# Altium PCB TAUV-Acoustics Power Board.PcbDoc
Units mil, origin at the board's own origin, x right, y up, seen from the top; angles counter-clockwise.
Board outline 2260 x 1615 mil, 2 copper layers (Top Layer, Bottom Layer); 34 components, 18 nets, 107 pads, 19 vias.
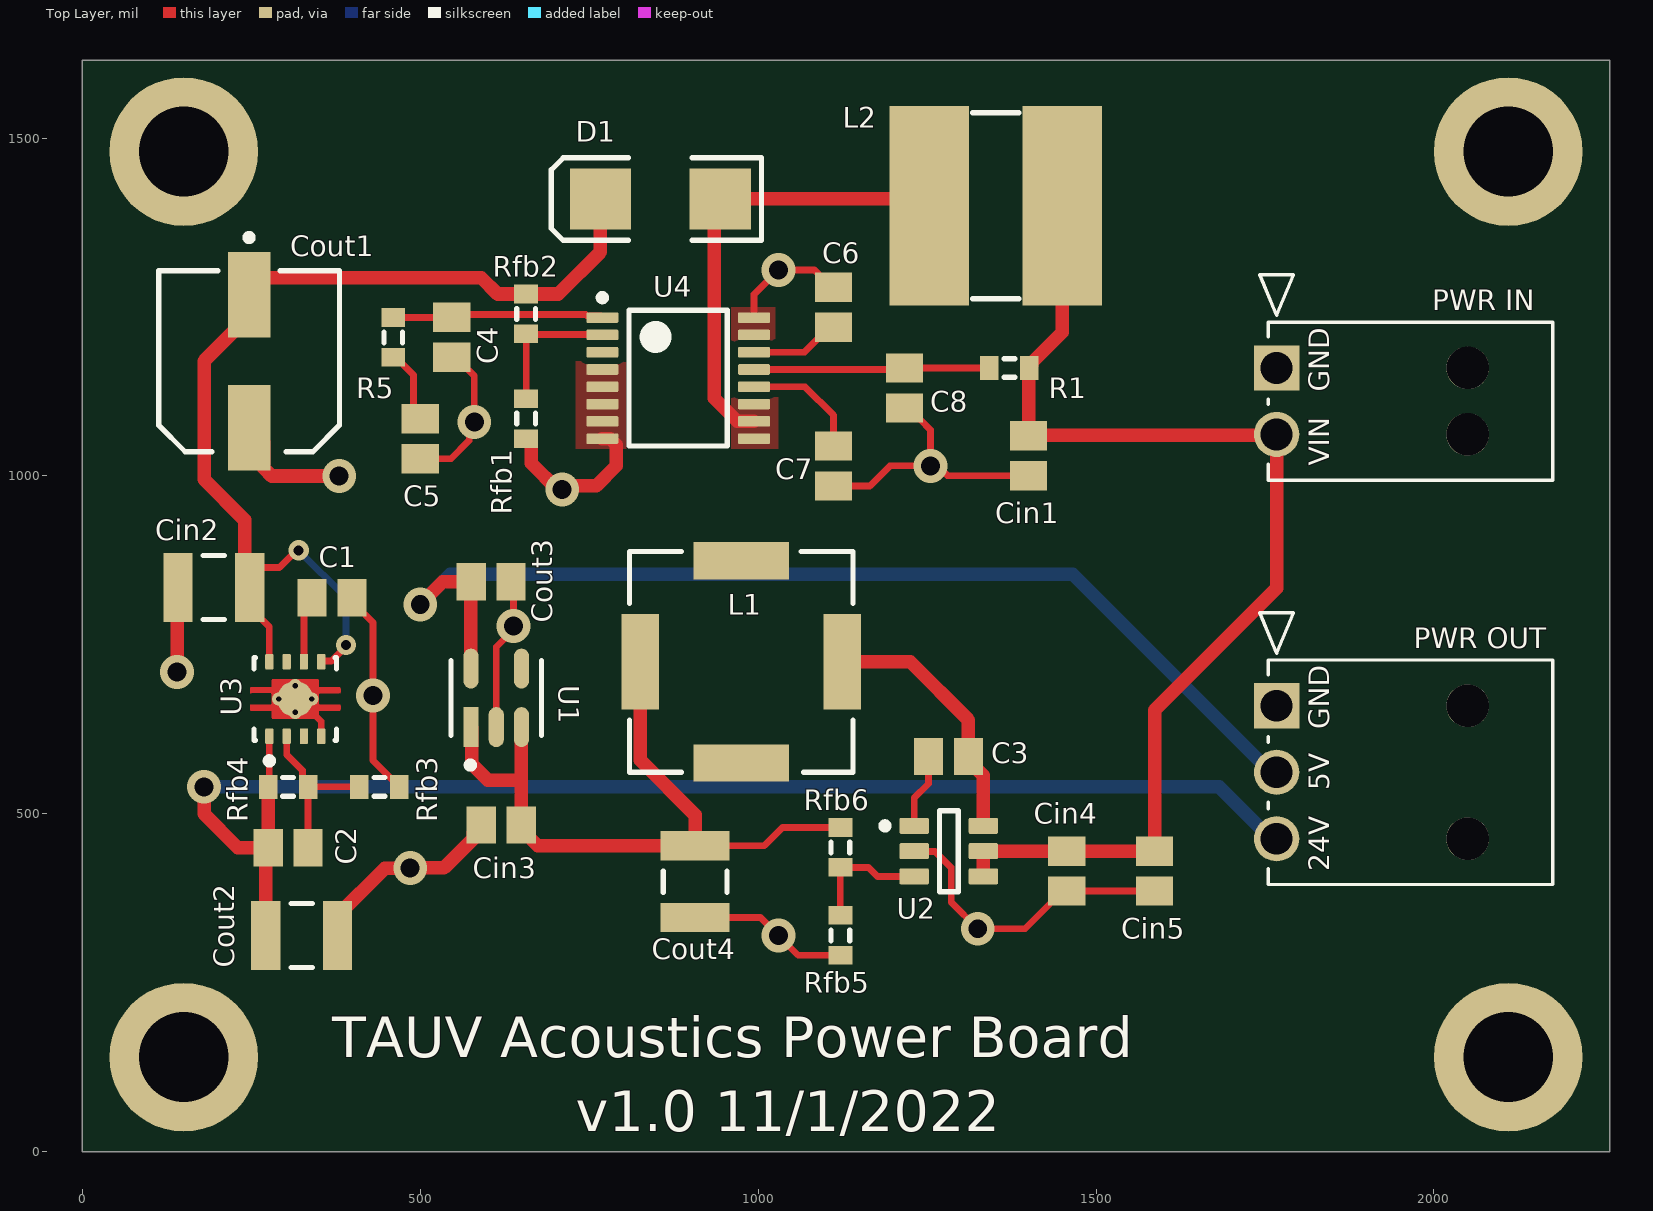
[diagram p0: Top Layer view]
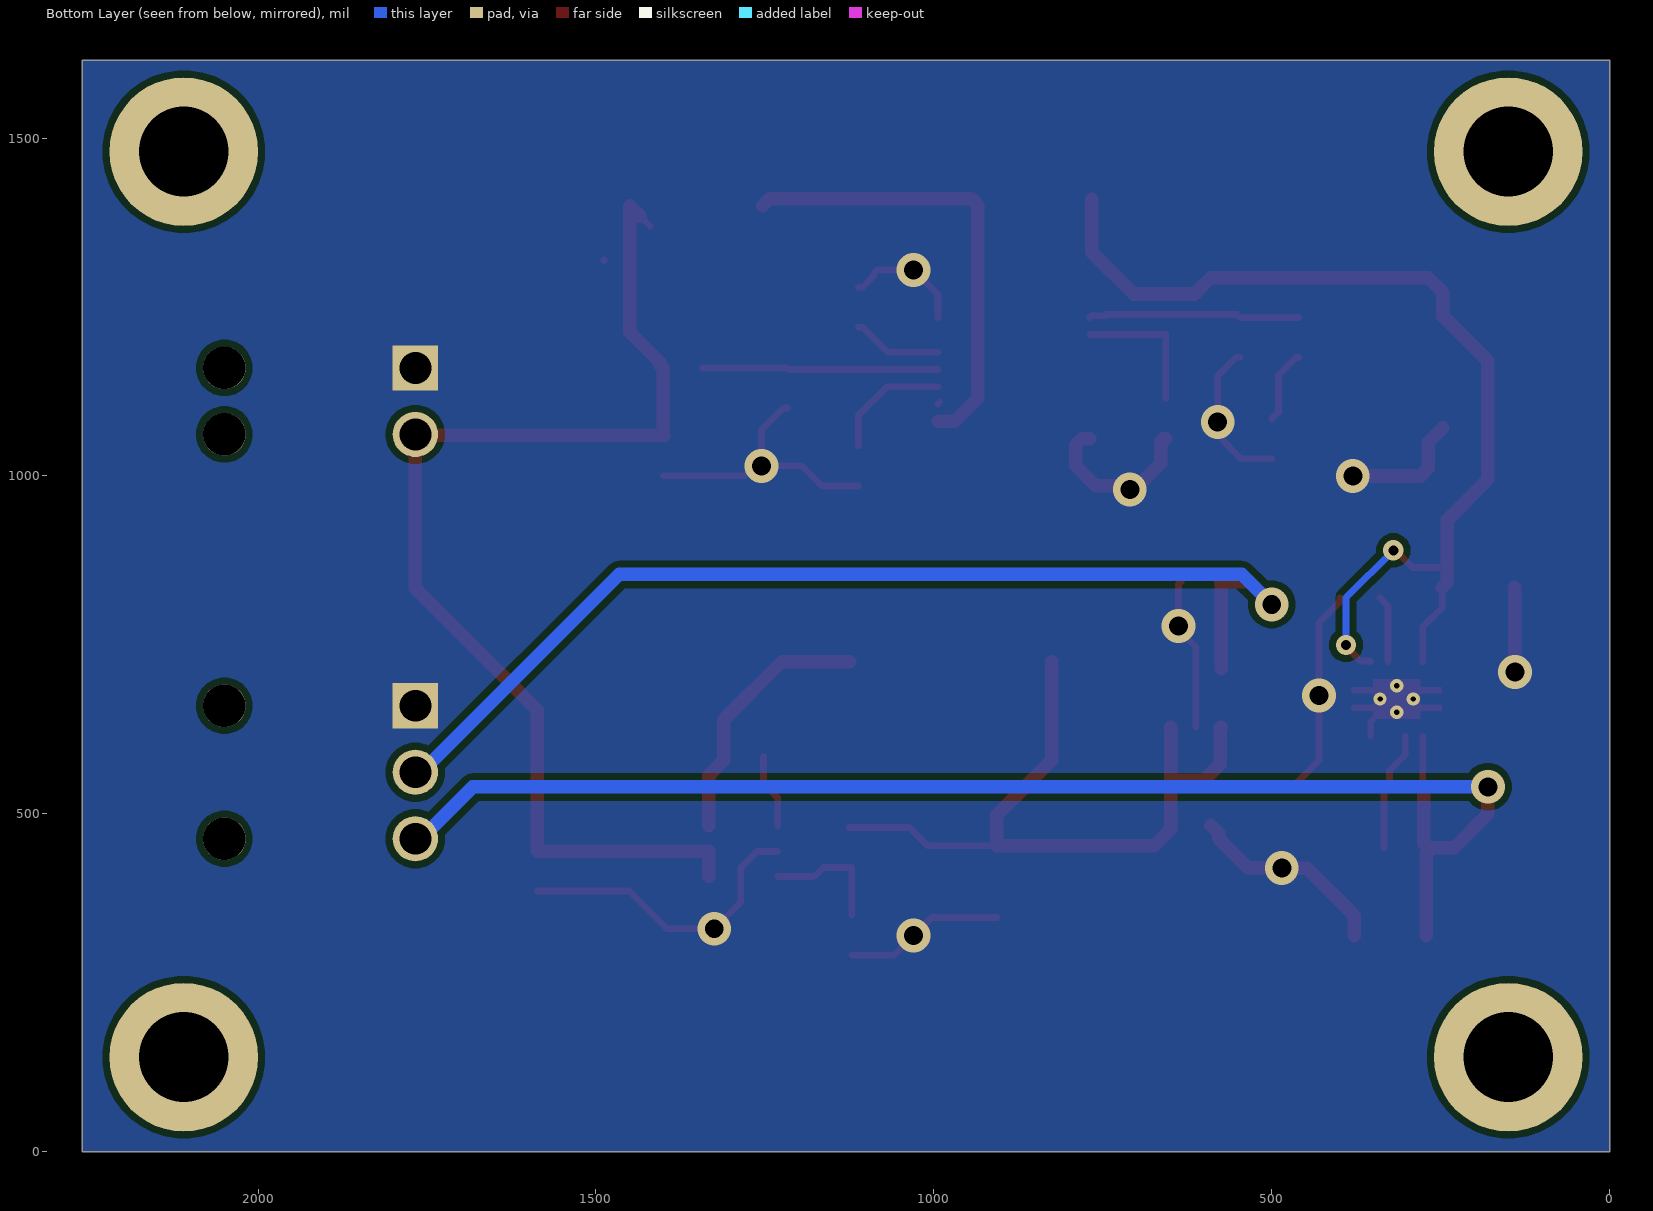
[diagram p1: Bottom Layer view, seen from below]

## Layer stack, top to bottom
Top Solder: solder mask 0.4, Solder Resist, Dk 3.5
Top Layer: signal copper 1.4
Dielectric 1: dielectric 12.6, FR-4, Dk 4.8
Bottom Layer: signal copper 1.4
Bottom Solder: solder mask 0.4, Solder Resist, Dk 3.5

## Board outline
0,0 2260,0 2260,1615 0,1615

## Design rules (kind name [scope] priority, off if disabled: settings)
Clearance [All] p1: gap=10 ignorepadtopadclearanceinfootprint=FALSE except(0: Arc-Hole Track-Hole SMDPad-Hole THPad-Hole Via-Hole Fill-Hole Poly-Hole Region-Hole Text-Hole)
HoleSize [All] p1: absolutevalues=TRUE maxlimit=200 minlimit=1 maxpercent=80.000 minpercent=20.000
PlaneConnect [All] p1: planeconnectstyle=Direct reliefexpansion=20 reliefentries=4 reliefconductorwidth=10 reliefairgap=10
PolygonConnect [All] p1: connectstyle=Direct reliefconductorwidth=10 reliefentries=4 polygonreliefangle="90 Angle" airgapwidth=10
RoomDefinition Main [InComponentClass('Main')] p1: confinementstyle=ConfineIn formatcopy=TRUE lockcomponents=FALSE outline -963.37,-0.2 1701.63,-0.2 1701.63,1584.8 -963.37,1584.8
RoutingVias [All] p1: holewidth=15 width=30 viastyle="Through Hole" minholewidth=28 minwidth=50 maxholewidth=28 maxwidth=50
SolderMaskExpansion [All] p1: expansion=4 istentingtop=FALSE
Width [All] p1: maxlimit=50 minlimit=5 preferedwidth=10
28 further rules are at their usual default settings.

## Components (designator, comment, footprint, x,y, rotation, side; value= is the part's Value field where it differs from the comment)
C1 "Low ESR" C0805 369.45,820 r180 top value="10 nF"
C2 "Reg" C0805 304.45,450 r180 top value="10 nF"
C3 "Low ESR" C0805 1281.63,584.8 r180 top value="100 nF"
C4 "Low ESR" C0805 546.63,1205.28 r90 top value=100pF
C5 "Low ESR" C0805 500,1055 r90 top value="2.2 nF"
C6 "Low ESR" C0805 1111.63,1249.8 r270 top value="10 nF"
C7 "Low ESR" C0805 1111.63,1014.8 r90 top value="100 nF"
C8 "Reg" C0805 1216.63,1130.28 r90 top value="100 nF"
Cin1 "Low ESR" C0805 1400,1030 r90 top value="2.2 μF"
Cin2 "Low ESR" C1210 194.45,835 r180 top value="10 μF"
Cin3 "Low ESR X7R" C0805 619.8,483.37 r180 top value="1 μF"
Cin4 "Reg" C0805 1456.63,415.28 r90 top value="100 nF"
Cin5 "Reg" C0805 1586.63,415.28 r90 top value="1 μF"
Cout1 "Low ESR" FP-EEH-D8-MFG 246.63,1169.8 r270 top
Cout2 "Low ESR" C1210 324.45,320 r180 top value="10 μF"
Cout3 "Low ESR X7R" C0805 604.8,843.37 r180 top value="1 μF"
Cout4 "Low ESR" C1210 906.63,399.8 r90 top value="10 μF"
D1 "550mV  1A" SMB 855.21,1409.8 r180 top
L1 "5.6 µH 120mOhm" WE-TPC-8012 975,725 r180 top
L2 "390µH 1.77Ohm" WE-PD2-L 1351.57,1400 r180 top
"PWR IN" "1053131302" CON_1053131302 1767.32,1160 r90 top
"PWR OUT" "1053131303" CON_1053131303 1767.32,660 r90 top
R1 "±5%" J1-0603 1371.63,1159.8 r0 top value="10 Ohm"
R5 "±1%" J1-0603 460,1205 r90 top value=12.1k
Rfb1 "±0.1%" J1-0603 656.63,1084.8 r90 top value=11k
Rfb2 "±0.1%" J1-0603 656.63,1239.8 r90 top value=205k
Rfb3 "±0.1%" J1-0603 439.45,540 r180 top value=12k
Rfb4 "±0.1%" J1-0603 304.45,540 r180 top value=249k
Rfb5 "±0.1%" J1-0603 1121.63,320.28 r90 top value=22.1k
Rfb6 "±0.1%" J1-0603 1121.63,450.28 r90 top value=100k
U1 "TPS7A2050PDBVR" FP-DBV0005A-IPC_B 612.4,671.69 r90 top
U2 "LMR50410YQDBVRQ1" FP-DBV0006A-MFG 1282.1,444.8 r0 top
U3 "TPS7A4901DRBR" FP-DRB0008A-MFG 315,670 r90 top
U4 "LM5000-3MTC/NOPB" PW0016A_L 881.63,1144.8 r0 top

## Footprints (in the part's own frame and the unit in brackets; to place one, negate y for a bottom-side part, rotate by r counter-clockwise, add the part's x,y. Pads: shape width x height; smd on the part's side, far side on the other; paste and mask are expansions set on the pad)
C0805 [mm] "Chip Capacitor, Body 2.0x1.3mm, IPC High Density"
  rect 1.1x1.4 smd: 1(-0.75,0) 2(0.75,0)
  body extent -1.1,-0.72 1.1,0.72, height 1.4
C1210 [mm] "Chip Capacitor, Body 3.2x2.5mm, IPC High Density"
  rect 1.1x2.6 smd: 1(-1.35,0) 2(1.35,0)
  silkscreen extent -0.4,-1.2 0.4,1.2, body extent -1.7,-1.35 1.7,1.35, height 1.3
CON_1053131302 [mm]
  rect 1.7x1.7 hole 1.2 mask+0.076: 1(0,0)
  round 1.7 hole 1.2 mask+0.076: 2(-2.5,0)
  round 1.6 hole 1.6 unplated mask+0.076: 3(0,-7.18) 4(-2.5,-7.18)
  silkscreen extent -4.22,-10.38 3.5,0.64, body extent 0,0 0.25,0.25, height 0.25
CON_1053131303 [mm]
  rect 1.7x1.7 hole 1.2 mask+0.076: 1(0,0)
  round 1.7 hole 1.2 mask+0.076: 2(-2.5,0) 3(-5,0)
  round 1.6 hole 1.6 unplated mask+0.076: 4(0,-7.18) 5(-5,-7.18)
  silkscreen extent -6.72,-10.38 3.5,0.64, body extent 0,0 0.25,0.25, height 0.25
FP-DBV0005A-IPC_B [mm]
  rect 1.505x0.572 smd paste+0 mask+0: 1(-1.1,0.95)
  rrect100% 1.505x0.572 smd paste+0 mask+0: 2(-1.1,0) 3(-1.1,-0.95) 4(1.1,-0.95) 5(1.1,0.95)
  silkscreen extent -2.65,-1.7 1.4,1.7, body extent -2.1,-1.7 2.1,1.7, height 0.25
FP-DBV0006A-MFG [mm]
  rrect17% 1.1x0.6 smd paste+0 mask+0: 1(-1.3,0.95) 2(-1.3,0) 3(-1.3,-0.95) 4(1.3,-0.95) 5(1.3,0) 6(1.3,0.95)
  silkscreen extent -2.52,-1.53 0.35,1.53, body extent -1.95,-1.78 1.95,1.78, height 0.25
FP-DRB0008A-MFG [mm]
  rrect32% 0.6x0.31 smd paste+0 mask+0: 1(-1.4,0.975) 2(-1.4,0.325) 3(-1.4,-0.325) 4(-1.4,-0.975) 5(1.4,-0.975) 6(1.4,-0.325) 7(1.4,0.325) 8(1.4,0.975)
  round 1.35 smd paste-1000 mask+0: 9(0,0)
  Top Layer region: -0.7,0.875 -0.49,0.875 -0.471,0.879 -0.455,0.89 -0.444,0.906 -0.44,0.925 -0.44,0.925 -0.44,1.65 -0.433,1.675 -0.415,1.693 -0.39,1.7 -0.39,1.7 -0.26,1.7 -0.241,1.696 -0.225,1.685 -0.214,1.669 -0.21,1.65 -0.21,1.65 -0.21,0.925 -0.206,0.906 -0.195,0.89 -0.179,0.879 -0.16,0.875 -0.16,0.875 0.16,0.875 0.179,0.879 0.195,0.89 0.206,0.906 0.21,0.925 0.21,0.925 0.21,1.65 0.214,1.669 0.225,1.685 0.241,1.696 0.26,1.7 0.26,1.7 0.39,1.7 0.415,1.693 0.433,1.675 0.44,1.65 0.44,1.65 0.44,0.925 0.444,0.906 0.455,0.89 0.471,0.879 0.49,0.875 0.49,0.875 0.7,0.875 0.725,0.868 0.743,0.85 0.75,0.825 0.75,0.825 0.75,-0.825 0.743,-0.85 0.725,-0.868 0.7,-0.875 0.7,-0.875 0.49,-0.875 0.471,-0.879 0.455,-0.89 0.444,-0.906 0.44,-0.925 0.44,-0.925 0.44,-1.65 0.433,-1.675 0.415,-1.693 0.39,-1.7 0.39,-1.7 0.26,-1.7 0.241,-1.696 0.225,-1.685 0.214,-1.669 0.21,-1.65 0.21,-1.65 0.21,-0.925 0.206,-0.906 0.195,-0.89 0.179,-0.879 0.16,-0.875 0.16,-0.875 -0.16,-0.875 -0.179,-0.879 -0.195,-0.89 -0.206,-0.906 -0.21,-0.925 -0.21,-0.925 -0.21,-1.65 -0.217,-1.675 -0.235,-1.693 -0.26,-1.7 -0.26,-1.7 -0.39,-1.7 -0.415,-1.693 -0.433,-1.675 -0.44,-1.65 -0.44,-1.65 -0.44,-0.925 -0.444,-0.906 -0.455,-0.89 -0.471,-0.879 -0.49,-0.875 -0.49,-0.875 -0.7,-0.875 -0.725,-0.868 -0.743,-0.85 -0.75,-0.825 -0.75,-0.825 -0.75,0.825 -0.743,0.85 -0.725,0.868 -0.7,0.875
  silkscreen extent -2.45,-1.55 1.55,1.55, body extent -1.5,-1.5 1.5,1.5, height 1
FP-EEH-D8-MFG [mm]
  rect 3.2x1.6 smd paste+0 mask+0: 1(-2.5,0) 2(2.5,0)
  silkscreen extent -4.77,-3.4 3.4,3.4, body extent -4.35,-3.65 4.35,3.65, height 0.25
J1-0603 [mm] "Chip Resistor, Body 1.6x0.8mm, IPC High Density"
  rect 0.7x0.9 smd: 1(-0.75,0) 2(0.75,0)
  silkscreen extent -0.2,-0.35 0.2,0.35, body extent -0.85,-0.48 0.85,0.48, height 0.9
PW0016A_L [mm] "SOP, 16-Leads, Body 5.1x4.5mm, Pitch 0.65mm, IPC High Density"
  rrect25% 1.2x0.4 smd: 1(-2.85,2.275) 2(-2.85,1.625) 3(-2.85,0.975) 4(-2.85,0.325) 5(-2.85,-0.325) 6(-2.85,-0.975) 7(-2.85,-1.625) 8(-2.85,-2.275) 9(2.85,-2.275) 10(2.85,-1.625) 11(2.85,-0.975) 12(2.85,-0.325) 13(2.85,0.325) 14(2.85,0.975) 15(2.85,1.625) 16(2.85,2.275)
  silkscreen extent -2.97,-2.55 1.85,3.15, body extent -3.21,-2.5 3.21,2.5, height 1
SMB [mm] "DO-214-AA/SMB; 2 C-Bend Leads; Body 5.3 x 3.6 mm, inc. leads (LxW)"
  rect 2.3x2.3 smd: 1(-2.25,0) 2(2.25,0)
  silkscreen extent -3.8,-1.55 4.1,1.55
WE-PD2-L [mm] "SMD Inductor, 2-Leads, Body 7.8 x 7.0 mm"
  rect 3x7.5 smd: 1(-2.5,0) 2(2.5,0)
  silkscreen extent -0.87,-3.5 0.87,3.5, body extent -3.81,-3.5 3.81,3.5, height 4.89
WE-TPC-8012 [mm] "SMD Inductor, 2-Leads, Body 8.0 x 8.0 mm"
  rect 1.4x3.6 smd: 1(-3.8,0) 2(3.8,0)
  rect 3.6x1.4 smd: 3(0,3.8) 4(0,-3.8)
  silkscreen extent -4.2,-4.15 4.2,4.15, body extent -4,-4 4,4, height 1.09

## Part data
C1 C2 C3 C4 C5 C6 C7 C8 Cin1 Cin2 Cin3 Cin4 Cin5 Cout2 Cout3 Cout4: library part Cap, "Capacitor", LatestRevisionDate=17-Jul-2002, LatestRevisionNote="Re-released for DXP Platform.", PackageDescription="Radial Cap, Thru-Hole; 2 Leads; 0.3 in Pin Spacing", PackageReference=RAD-0.3, Published=8-Jun-2000, Publisher="Altium Limited"
Cout1: library part CMP-05428-001211-1, "Conductive Polymer Hybrid Aluminum Electrolytic Capacitors 68uF ±20% 35V RADIAL SMT 6.3x7.7mm", Capacitance=68uF, Case/Package=Radial, ESR (Equivalent Series Resistance)=35mR, Leakage Current=23.8uA, Max Operating Temperature=105°C, Min Operating Temperature=-55°C, Package Quantity=900, Ratings=AEC-Q200, Ripple Current=2A, Tolerance=20%, Voltage=35V, Construction=Cylindrical, Diameter=6.3mm, Height=7.7mm, Height - Seated (Max)=0.315inch, Lead Diameter=0.65mm, Lead Free="Lead Free", Lead Pitch=1.8mm, Length=7.7mm, Life (Hours)=5000Hour, Material=Polymer, Mount="Surface Mount", Number of Pins=8, Packaging="Tape and Reel", Polarity=Polar, Radiation Hardening=No, REACH SVHC="No SVHC", Ripple Current (AC)=2A, Series=ZA, Technology=HYBRID, Termination=SMD/SMT, Voltage Rating=35V, Voltage Rating (DC)=35V
D1: library part "D Schottky", "Schottky Diode", Code_JEDEC=DO-214-AA, LatestRevisionDate=17-Jul-2002, LatestRevisionNote="Re-released for DXP Platform.", PackageDescription="DO-214-AA/SMB; 2 C-Bend Leads; Body 5.3 x 3.6 mm, inc. leads (LxW)", PackageReference=SMB, Published=8-Jun-2000, Publisher="Altium Limited"
L1: library part CMP-0227-00263-1, "SMD Shielded Tiny Power Inductor WE-TPC, L = 5.60 µH", Inductance="5.60 ÂµH", ComponentLink1Description="Manufacturer Link", ComponentLink1URL=http://www.we-online.com, ComponentLink2Description=Datasheet, ComponentLink2URL=http://www.we-online.de/katalog/media/pdf/7440680056.pdf, DatasheetVersion="ver 1, Apr-2009", PackageDescription="SMD Inductor, 2-Leads, Body 8.0 x 8.0 mm", PackageReference=WE-TPC-8012, PackageVersion=2009
L2: library part CMP-0227-00449-1, "SMD Power Inductor WE-PD2, L = 390 µH", Inductance="390 ÂµH", ComponentLink1Description="Manufacturer Link", ComponentLink1URL=http://www.we-online.com, ComponentLink2Description=Datasheet, ComponentLink2URL=http://www.we-online.de/katalog/media/pdf/744775239.pdf, DatasheetVersion="ver 1, Oct-2004", PackageDescription="SMD Inductor, 2-Leads, Body 7.8 x 7.0 mm", PackageReference=WE-PD2-L, PackageVersion=2004
"PWR IN" "PWR OUT": "No Description Available", Mfr_Name="Molex Connector Corporation", Copyright="Copyright (C) 2022 Ultra Librarian. All rights reserved.", RefDes=RefDes, Type=DEV
  "PWR IN": Manufacturer_Part_Number=1053131302
  "PWR OUT": Manufacturer_Part_Number=1053131303
R1 R5 Rfb1 Rfb2 Rfb3 Rfb4 Rfb5 Rfb6: library part Res3, "Resistor", LatestRevisionDate=29-May-2009, LatestRevisionNote="IPC-7351 Footprint Added.", PackageDescription="Chip Resistor", PackageReference=J1-0603, Published=8-Jun-2000, Publisher="Altium Limited"
U1: library part CMP-04917-000115-1, "300-mA, ultra-low-noise, low-IQ, low-dropout (LDO) linear regulator with high PSRR 5-SOT-23 -40 to 125", RoHS Compliant=Yes
U2: library part CMP-04918-000478-1, "NIXON PLUS-LMR50410YQDBVRQ1"
U3: library part CMP-04917-000048-2, "None", Dropout Voltage=333mV, Max Input Voltage=35V, Max Operating Temperature=125°C, Max Output Current=150mA, Min Current Limit=220mA, Min Input Voltage=3V, Min Operating Temperature=-40°C, Output Voltage=33V, Quiescent Current=100uA, Accuracy=1.5%, Contact Plating=Gold, Lead Free="Lead Free", Mount="Surface Mount", Number of Outputs=1, Number of Pins=8, Number of Regulators=1, Output Current=150mA, Output Type=Adjustable, Packaging="Cut Tape", Polarity=Positive, RoHS Compliant=Yes
U4: library part CMP-0069-01337-3, "High Voltage Switch Mode Regulator, 16-pin TSSOP, Pb-Free", Manufacturer="Texas Instruments", PackageTopMarking=NSZXYTT*LM5000*3MTC, PowerWise=N, Code_JEDEC=MO-153-AB, ComponentLink1Description="Datasheet URL", ComponentLink1URL=http://www.ti.com/general/docs/lit/getliterature.tsp?genericPartNumber=LM5000&fileType=pdf, CompType=Switcher, PackageDescription="Molded TSSOP, Jedec, 5 x 4.4 x 0.9mm Body, 16 Lead, 0.65mm Pitch", PackageReference=PW0016A, PinCount=16, RoHS=Y

## Free pads (board coordinates)
  round 220 hole 133: M3(150,140) M3(150,1480) M3(2110,140) M3(2110,1480)

## Via types
v1: diameter 50, hole 28, Top Layer to Bottom Layer, 13 vias
v2: diameter 19.68, hole 7.87, Top Layer to Bottom Layer, 4 vias
v3: diameter 30, hole 15, Top Layer to Bottom Layer, 2 vias

## Nets (pads, with @x,y where several pads share a name; then routed paths per layer and width w, separated by ;. In a path a pad name is that pad's centre, name@x,y a point inside that pad or via, vN(x,y) a via of type N, cw(c..) or ccw(c..) an arc to the next point about the centre after c; other vN are vias at no path point)
GND: "PWR IN.1" "PWR OUT.1" C1.1 C4.1 C5.1 C6.1 C7.1 C8.1 Cin1.1 Cin2.2 Cin3.2 Cin4.1 Cin5.1 Cout1.2 Cout2.1 Cout3.1 Cout4.1 Rfb1.1 Rfb3.1 Rfb5.1 U1.2 U2.2 U3.4 U3.9 U4.4 U4.5 U4.6 U4.7 U4.8 U4.15 U4.16 | length 2994
  Top Layer w10: U3.9 320,670 353.39,636.61 U3.4 ; C1.1 398.98,814.09 430,783.07 v1(430,675) 430,578.98 Rfb3.1 ; C5.1 545.47,1025.47 572.35,1052.35 572.35,1072.35 v1(580,1080) 580,1148.29 552.54,1175.75 C4.1 ; U1.2 612.4,746.94 637.84,772.38 v1(637.84,778.08) ; v1@634.33,775.67 637.84,779.18 637.84,839.86 Cout3.1 ; Cout4.1 1003.35,346.65 1059.25,290.75 Rfb5.1 ; U4.16 993.84,1268.84 v1(1030,1305) 1083.21,1305 1089.07,1299.14 1089.07,1295.98 1105.73,1279.33 C6.1 ; C7.1 1165.28,985.28 1195,1015 v1(1255,1015) ; C8.1 1222.54,1100.75 1239.19,1084.09 1255,1068.29 v1(1255,1015) ; U2.2 1231.37,444.36 1261.72,444.36 1285.59,420.49 1285.59,369.41 v1(1325,330) 1394.98,330 1450.73,385.75 Cin4.1 Cin5.1 ; Cin1.1 1280.35,1000.47 1265.82,1015 v1(1255,1015)
  Top Layer w20: v1(140,710) 140.65,710.65 140.65,834.35 Cin2.2 ; Cout1.2 268.13,1049.88 268.13,1011.72 279.84,1000 v1(380,1000) ; Cout2.1 377.6,349.53 447.64,419.57 484.57,419.57 v1(485,420) 535,420 578.62,463.62 578.62,471.71 Cin3.2 ; Rfb1.1 660.57,1055.28 664.35,1051.5 664.35,1018.83 703.17,980 v1(710,980) 715.74,985.74 760.74,985.74 790,1015 790,1046.16 780.92,1055.24 U4.8
  other v1: 1030,320
  other v2: 315,650.32 290.39,670 339.61,670 315,689.68
NetC1_2: C1.2 U3.6 | length 99.9
  Top Layer w10: U3.6 327.8,807.87 C1.2
NetC2_1: C2.1 Rfb3.2 Rfb4.1 U3.2 | length 254
  Top Layer w10: U3.2 302.2,587.8 325.63,564.37 325.63,548.34 Rfb4.1 ; C2.1 Rfb4.1 ; Rfb3.2 Rfb4.1
NetC2_2: "PWR OUT.3" C2.2 Cout2.2 Rfb4.2 U3.1 | length 2056.1
  Top Layer w10: Rfb4.2 276.61,541.69 U3.1
  Top Layer w20: v1(180,540) 180,500 230,450 263.27,450 263.27,448.5 271.3,440.47 Cout2.2 ; C2.2@274.92,455.91 Rfb4.2
  Bottom Layer w20: v1(180,540) 1682.14,540 1758.99,463.15 1767.32,463.15
NetC3_1: C3.1 L1.1 U2.6 | length 388
  Top Layer w20: L1.1 1225,725 1311.16,638.84 1311.16,578.9 1333.29,556.77 U2.6
NetC3_2: C3.2 U2.1 | length 111.4
  Top Layer w10: U2.1 1230.92,523.37 1252.1,544.55 C3.2
NetC4_2: C4.2 R5.2 U4.1 | length 313.1
  Top Layer w10: R5.2 C4.2@546.63,1234.53 ; C4.2 550.88,1239.06 744.95,1239.06 746.76,1237.24 766.55,1237.24 U4.1
NetC5_2: C5.2 R5.1 | length 109.8
  Top Layer w10: R5.1 463.94,1175.47 490,1149.41 490,1094.53 C5.2
NetC6_2: C6.2 U4.14 | length 133.2
  Top Layer w10: U4.14 1068.64,1183.19 1105.73,1220.28 C6.2
NetC7_2: C7.2 U4.12 | length 180.9
  Top Layer w10: U4.12 1069.62,1132.01 1111.63,1090 C7.2
NetC8_2: C8.2 R1.1 U4.13 | length 349.2
  Top Layer w10: U4.13 1214.43,1157.6 C8.2 R1.1
NetCin1_2: "PWR IN.2" Cin1.2 Cin4.2 Cin5.2 L2.1 R1.2 U2.4 U2.5 | length 1755.4
  Top Layer w10: L2.1@1420,1370 L2.1@1435,1385 ; L2.1@1488.15,1318.57 L2.1@1488.15,1320
  Top Layer w20: U2.4 U2.5 Cin4.2 Cin5.2 1586.63,653.54 1767.32,834.23 1767.32,1061.57 1766.3,1060.55 1401.02,1060.55 Cin1.2@1400.58,1060.11 ; Cin1.2@1399.53,1060 Cin1.2 Cin1.2@1400.58,1060.11 ; L2.1@1435,1385 L2.1 1450,1212.58 1404.94,1167.52 1404.94,1163.58 R1.2 1400.58,1159.22 Cin1.2@1400.58,1060.11
NetCin2_1: Cin2.1 Cout1.1 D1.2 Rfb2.2 U3.5 U3.8 | length 1557.7
  Top Layer w10: Cin2.1 247.6,805.47 276.61,776.46 U3.8 ; Cin2.1@247.6,864.53 291.41,864.53 316.89,890 v3(320,890) ; U3.5 353.39,725.17 354.49,726.28 368.63,726.28 390,747.65 v3(390,750)
  Top Layer w20: Cin2.1 240,842.6 240,935 180,995 180,1170.1 246.63,1236.73 246.63,1272.01 268.13,1293.5 590.16,1293.5 614.33,1269.33 Rfb2.2 704.33,1269.33 766.63,1331.63 D1.2
  Bottom Layer w10: v3(320,890) 390,820 v3(390,750)
NetCin3_1: Cin3.1 Cout4.2 L1.2 Rfb6.2 U1.1 U1.3 | length 1092.6
  Top Layer w10: Cout4.2 1009.11,452.95 1035.96,479.8 Rfb6.2 Rfb6.2@1125.57,479.8
  Top Layer w20: U1.1 576.26,627.11 576.26,573.74 600,550 649.57,550 ; U1.3 649.57,628.13 649.57,550 ; L1.2 825.39,579.61 906.63,498.37 Cout4.2 673.84,452.95 649.33,477.46 Cin3.1 649.57,483.6 649.57,550
NetCout3_2: "PWR OUT.2" Cout3.2 U1.5 | length 1624.6
  Top Layer w10: Cout3.2@575,843.09 Cout3.2
  Top Layer w20: v1(500,810) 533.37,843.37 Cout3.2 ; U1.5 Cout3.2@575,843.09
  Bottom Layer w20: v1(500,810) 544.48,854.48 1465.52,854.48 1758.43,561.57 1767.32,561.57
NetD1_1: D1.1 L2.2 U4.9 U4.10 U4.11 | length 688.9
  Top Layer w10: U4.11@991.12,1109.13 U4.11
  Top Layer w20: U4.10 969.17,1080.83 935,1115 935,1401.01 943.99,1410 1243.15,1410 L2.2
NetRfb1_2: Rfb1.2 Rfb2.1 U4.2 | length 209.4
  Top Layer w10: Rfb1.2 Rfb2.1 657.38,1209.53 768.68,1209.53 U4.2
NetRfb5_2: Rfb5.2 Rfb6.1 U2.3 | length 185.8
  Top Layer w10: Rfb5.2 Rfb6.1 1163.25,420.75 1176.59,407.4 U2.3
pads on no net: "PWR IN.3" "PWR IN.4" "PWR OUT.4" "PWR OUT.5" L1.3 L1.4 U1.4 U3.3 U3.7 U4.3

## Polygon pours and split planes (outlines as drawn)
GND on Top Layer "GND_L01_P001" (solid, pour order 1): 730,1170 805,1170 805,1040 730,1040
NetD1_1 on Top Layer "NETD1_1_L01_P002" (solid, pour order 2): 959.92,1120 1030,1120 1030,1040 960,1040
GND on Top Layer "GND_L01_P003" (solid, pour order 3): 960,1250 1025,1250 1025,1195 960,1195
GND on Bottom Layer "v" (solid, pour order 4): 0,1615 2260,1615 2260,0 0,0

## Silkscreen, mask and mechanical layers (free items; w line width, h text height)
Top Overlay:
  text "GND" at 1845,1125 h30 r90
  text "VIN" at 1845,1015 h30 r90
  text "GND" at 1845,625 h30 r90
  text "5V" at 1845,535 h30 r90
  text "24V" at 1845,415 h30 r90
  text "TAUV Acoustics Power Board" at 370,140 h60
  text "v1.0 11/1/2022" at 730,30 h60